# EAGLE board breakoutBoard (EAGLE 9.0.0)
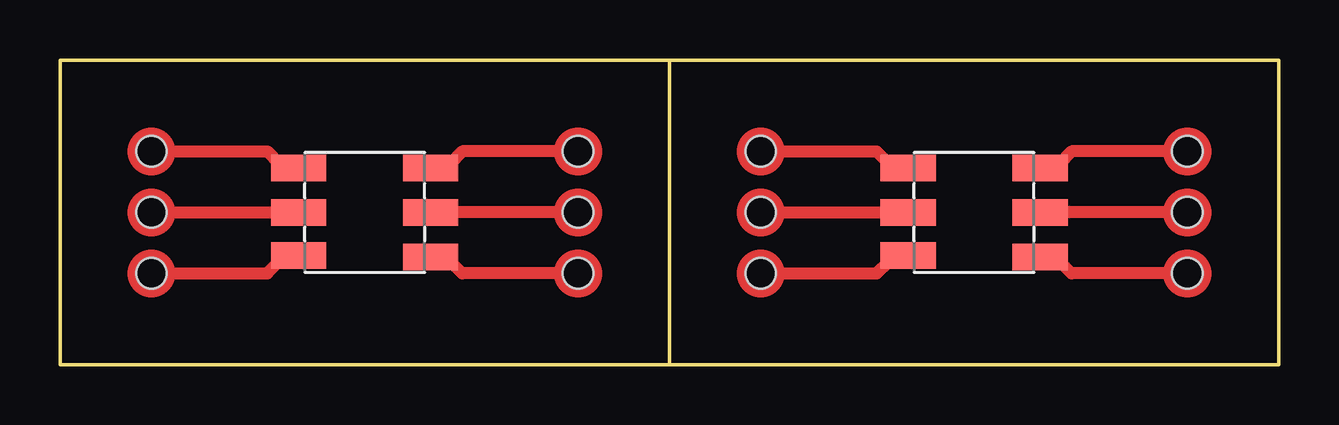
[diagram p0: board, top side]

Size 50.8 x 12.7 mm. Coordinates in mm from the lower left corner, seen from the top.
Outline: 25.4,0 0,0 0,12.7 25.4,12.7
Outline: 25.4,0 25.4,12.7
Outline: 25.4,0 50.8,0 50.8,12.7 25.4,12.7
Copper layers (1*16): Top 0.035mm / dielectric 1.5mm / Bottom 0.035mm
Design rules "default": minimum track width 6mil, minimum drill 0.35mm, track to track 6mil, track to pad 6mil, pad to pad 6mil, via to via 6mil, smd to smd 6mil, copper to edge 40mil, drill to drill 6mil, minimum pad ring 10mil, minimum via ring 8mil, stop-mask expansion 4mil, vias tented up to drill 0mil, thermal gap 10mil
Holes 1.27 mm at 29.21,3.81 29.21,6.35 29.21,8.89 46.99,3.81 46.99,6.35 46.99,8.89 3.81,3.81 3.81,6.35 3.81,8.89 21.59,3.81 21.59,6.35 21.59,8.89
tKeepout: 1 lines

## Footprints (pad centres in the part's own frame; a part is rotated, then mirrored left to right if it is on the bottom)
APA102C-5050-SMD = smd 2.3 x 1.1: 1 -2.75,1.85; 2 -2.75,0; 3 -2.75,-1.8; 4 2.75,-1.85; 5 2.75,0; 6 2.75,1.85

## Placement (x,y rotation side)
E$1  [APA102C-5050-SMD]  38.1,6.35 0 top
E$2  [APA102C-5050-SMD]  12.7,6.35 0 top

## Library data of the parts
E$1 E$2 = launchpadParts

## Tracks (layer width: path | path; a pad name or v marks a point on that pad's centre or on a via)
S$1
  Top 0.508: 3.81,6.35 9.4,6.35
S$2
  Top 0.508: 21.59,6.35 16,6.35
S$3
  Top 0.508: 21.59,8.89 16.76,8.89 16.26,8.38
S$4
  Top 0.508: 3.81,3.81 8.64,3.81 9.14,4.32
S$5
  Top 0.508: 3.81,8.89 8.64,8.89 9.14,8.38
S$6
  Top 0.508: 21.59,3.81 16.76,3.81 16.26,4.32
S$7
  Top 0.508: 29.21,6.35 34.8,6.35
S$8
  Top 0.508: 46.99,6.35 41.4,6.35
S$9
  Top 0.508: 46.99,8.89 42.16,8.89 41.66,8.38
S$10
  Top 0.508: 29.21,3.81 34.04,3.81 34.54,4.32
S$11
  Top 0.508: 29.21,8.89 34.04,8.89 34.54,8.38
S$12
  Top 0.508: 46.99,3.81 42.16,3.81 41.66,4.32
(copper drawn outside any net)
  shapes: Top circle x12